# EAGLE board sebix_esquematico (EAGLE 9.6.2)

Size 140.64 x 97.78 mm. Coordinates in mm from the lower left corner, seen from the top.
Outline: 0,0 140.64,0 140.64,97.78 0,97.78 0,0
Copper layers (1*16): Top 0.035mm / dielectric 1.5mm / Bottom 0.035mm
Design rules "default": minimum track width 6mil, minimum drill 0.35mm, track to track 6mil, track to pad 6mil, pad to pad 6mil, via to via 6mil, smd to smd 6mil, copper to edge 40mil, drill to drill 6mil, minimum pad ring 10mil, minimum via ring 8mil, stop-mask expansion 4mil, vias tented up to drill 0mil, thermal gap 10mil

## Footprints (pad centres in the part's own frame; a part is rotated, then mirrored left to right if it is on the bottom)
TUXGR_16X2_R2 = drill 1 pad 1.676: 1 -32,15.5; 2 -29.46,15.5; 3 -26.92,15.5; 4 -24.38,15.5; 5 -21.84,15.5; 6 -19.3,15.5; 7 -16.76,15.5; 8 -14.22,15.5; 9 -11.68,15.5; 10 -9.14,15.5; 11 -6.6,15.5; 12 -4.06,15.5; 13 -1.52,15.5; 14 1.02,15.5; 15 3.56,15.5; 16 6.1,15.5 | hole 2.5: -37.5,-15.5; 37.5,-15.5; -37.5,15.5; 37.5,15.5
ARDUINO2009 = drill 1.016 long: 1 33.02,2.54; 2 35.56,2.54; 3 38.1,2.54; 4 40.64,2.54; 5 43.18,2.54; 6 45.72,2.54; 7 50.8,2.54; 8 53.34,2.54; 9 55.88,2.54; 10 58.42,2.54; 11 60.96,2.54; 12 63.5,2.54; 13 63.5,50.8; 14 60.96,50.8; 15 58.42,50.8; 16 55.88,50.8; 17 53.34,50.8; 18 50.8,50.8; 19 48.26,50.8; 20 45.72,50.8; 21 41.656,50.8; 22 39.116,50.8; 23 36.576,50.8; 24 34.036,50.8; 25 31.496,50.8; 26 28.956,50.8; 27 26.416,50.8; 28 23.876,50.8 | hole 3.2: 15.24,50.8; 66.04,35.56; 66.04,7.62 | hole 2: 55.17,27.114
0207/10 = drill 0.813 octagon: 1 -5.08,0; 2 5.08,0
0204/7 = drill 0.813 octagon: 1 -3.81,0; 2 3.81,0
PT-10 = drill 1.016 pad 1.778 octagon: 1 -2.54,-5.08; 2 2.54,-5.08; 3 0,5.08
DS-01 = drill 0.813 long: 1 0,-3.81; 2 0,3.81
B/C11L = drill 1.321 pad 2.54 octagon: 1 -3.759,-8.255; 2 3.759,-8.255

## Placement (x,y rotation side)
DIS1  TUXGR_16X2_R2  [TUXGR_16X2_R2]  106.68,52.07 90 top
IC1  [ARDUINO2009]  57.15,6.35 90 top
R1  [0207/10]  7.62,92.71 180 top
R2  [0207/10]  73.66,7.62 180 top
R3  [0204/7]  80.01,60.96 270 top
R4  [PT-10]  64.77,66.04 0 top
S1  [DS-01]  74.93,38.1 180 top
SG1  B/C11L  [B/C11L]  71.12,86.36 0 top

## Library data of the parts
DIS1 = display-lcd; OC_FARNELL: unknown; OC_NEWARK: unknown
IC1 = arduino
R1-R3 = rcl; SPICEPREFIX: R
R4 = rcl; SPICEMODEL: POT; SPICEPREFIX: X
S1 = switch-dil; OC_FARNELL: unknown; OC_NEWARK: unknown
SG1 = buzzer; OC_FARNELL: unknown; OC_NEWARK: unknown

## Nets
5V: DIS1.2 IC1.3 R3.2 R4.1 S1.1
+3V3: IC1.2
GND: IC1.5 IC1.27
N$1: DIS1.16 R3.1
N$2: DIS1.3 R4.3
N$4: R1.1 SG1.2
N$5: DIS1.4 IC1.25
N$6: DIS1.6 IC1.24
N$7: DIS1.11 IC1.18
N$8: DIS1.12 IC1.17
N$9: IC1.19 R1.2
N$10: DIS1.13 IC1.16
N$11: DIS1.14 IC1.15
N$12: IC1.22 R2.1 S1.2
N$13: DIS1.1 IC1.4 R2.2 R4.2 SG1.1

## Tracks (layer width: path | path; a pad name or v marks a point on that pad's centre or on a via)
5V  (4 unrouted)
GND  (1 unrouted)
N$1  (1 unrouted)
N$2  (1 unrouted)
N$4  (1 unrouted)
N$5  (1 unrouted)
N$6  (1 unrouted)
N$7  (1 unrouted)
N$8  (1 unrouted)
N$9  (1 unrouted)
N$10  (1 unrouted)
N$11  (1 unrouted)
N$12  (2 unrouted)
N$13  (4 unrouted)